# Altium PCB Peak Detector With Banking.PcbDoc (part 4 of 5)
Units mil, origin at the board's own origin, x right, y up, seen from the top; angles counter-clockwise.
Board outline 3330 x 2725 mil, 4 copper layers (TopLayer, GROUND, MidLayer1, BottomLayer); 549 components, 391 nets, 1594 pads, 460 vias.
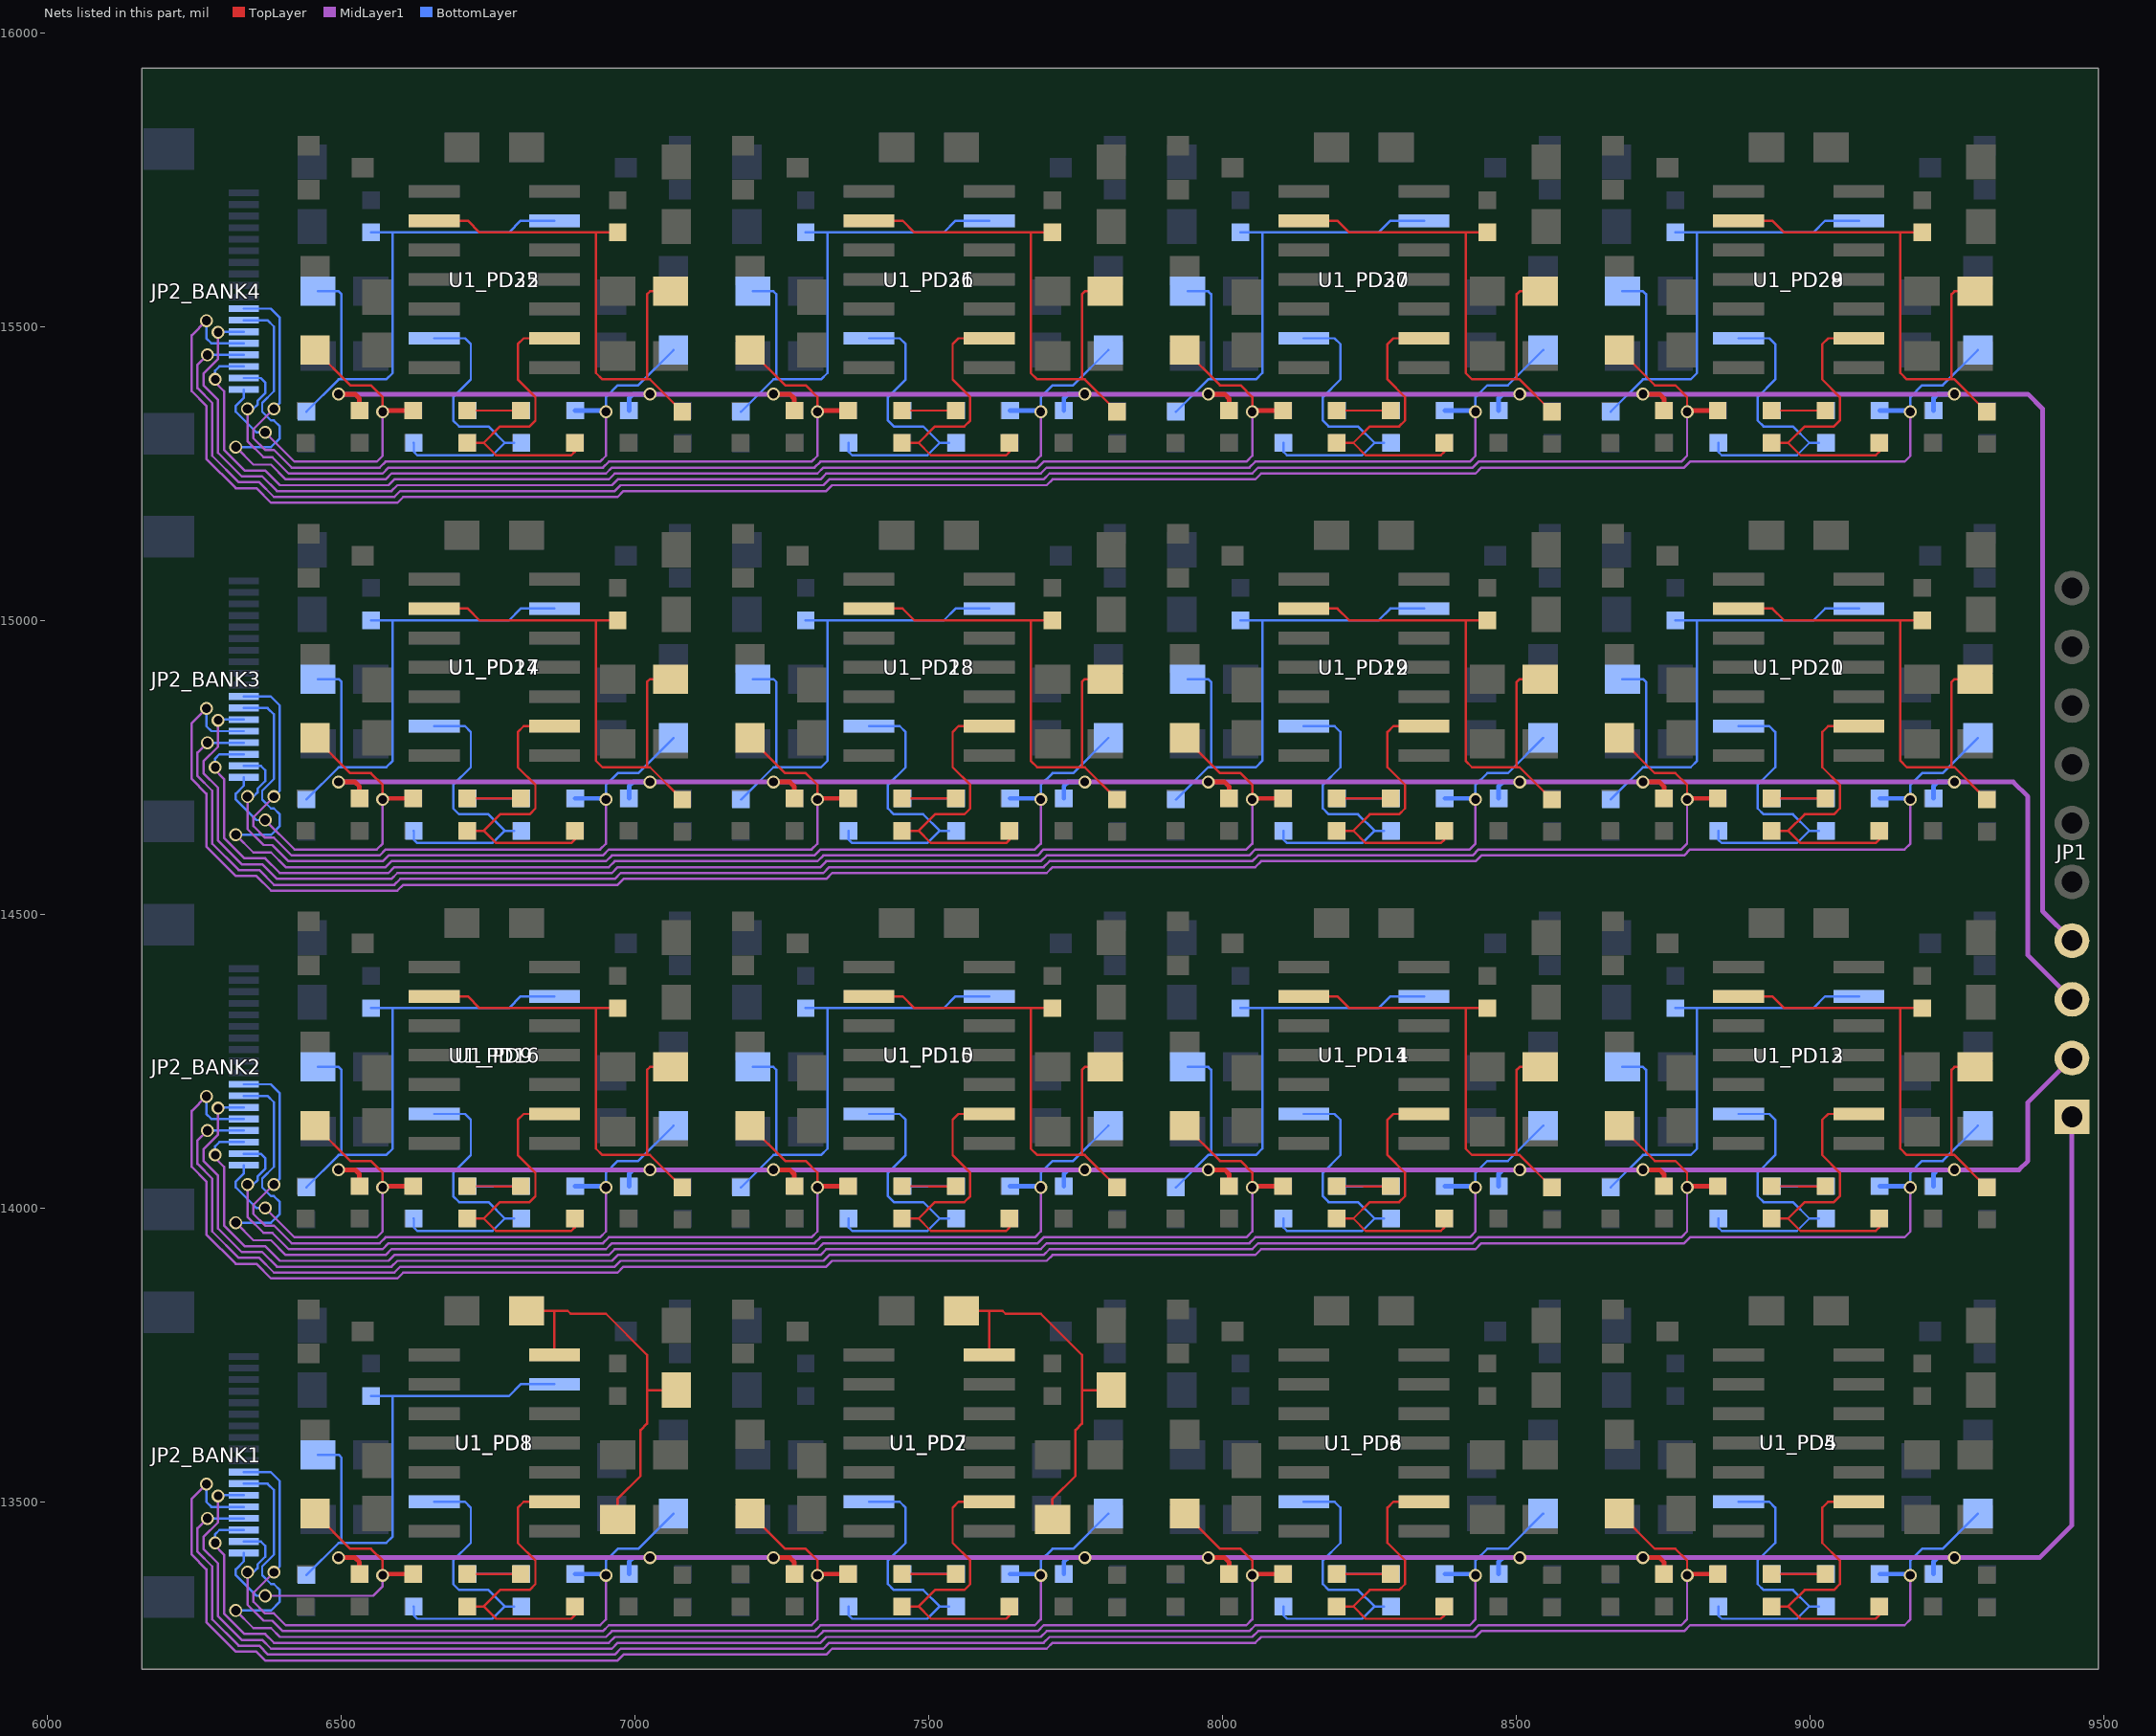
[diagram p6: the nets of this part, all layers, seen from the top]

## Via types
v1: diameter 22, hole 15, TopLayer to BottomLayer, 432 vias
v2: diameter 22, hole 16, TopLayer to BottomLayer, 28 vias

## Nets (pads, with @x,y where several pads share a name; then routed paths per layer and width w, separated by ;. In a path a pad name is that pad's centre, name@x,y a point inside that pad or via, vN(x,y) a via of type N, cw(c..) or ccw(c..) an arc to the next point about the centre after c; other vN are vias at no path point) (continued)
NetC5_PD8_2: C5_PD8.2 R8_PD8.2 R88_PD8.1 U1_PD8.9 | length 921.1
  BottomLayer w4: R8_PD8.2@6440,13375 6495,13430 6500,13430 ; C5_PD8.2@6459.99,13580 6495,13580 6500,13575 6500,13430 ; R88_PD8.1@6550,13680 6587,13680 ; U1_PD8.9@6862.37,13700 6805,13700 6785,13680 6587,13680 ; 6500,13430 6576,13430 6587,13441 6587,13680
NetC5_PD9_2: C5_PD9.2 R8_PD9.2 R88_PD9.1 U1_PD9.9 | length 921.1
  TopLayer w4: U1_PD9.9@6657.63,14360 6715,14360 6735,14340 6933,14340 ; R88_PD9.1@6970,14340 6933,14340 ; C5_PD9.2@7060.01,14240 7025,14240 7020,14235 7020,14090 ; R8_PD9.2@7080,14035 7025,14090 7020,14090 ; 6933,14340 6933,14101 6944,14090 7020,14090
NetC5_PD10_2: C5_PD10.2 R8_PD10.2 R88_PD10.1 U1_PD10.9 | length 921.1
  TopLayer w4: U1_PD10.9@7397.63,14360 7455,14360 7475,14340 7673,14340 ; R88_PD10.1@7710,14340 7673,14340 ; C5_PD10.2@7800.01,14240 7765,14240 7760,14235 7760,14090 ; R8_PD10.2@7820,14035 7765,14090 7760,14090 ; 7673,14340 7673,14101 7684,14090 7760,14090
NetC5_PD11_2: C5_PD11.2 R8_PD11.2 R88_PD11.1 U1_PD11.9 | length 921.1
  TopLayer w4: U1_PD11.9@8137.63,14360 8195,14360 8215,14340 8413,14340 ; R88_PD11.1@8450,14340 8413,14340 ; C5_PD11.2@8540.01,14240 8505,14240 8500,14235 8500,14090 ; R8_PD11.2@8560,14035 8505,14090 8500,14090 ; 8413,14340 8413,14101 8424,14090 8500,14090
NetC5_PD12_2: C5_PD12.2 R8_PD12.2 R88_PD12.1 U1_PD12.9 | length 921.1
  TopLayer w4: U1_PD12.9@8877.63,14360 8935,14360 8955,14340 9153,14340 ; R88_PD12.1@9190,14340 9153,14340 ; C5_PD12.2@9280.01,14240 9245,14240 9240,14235 9240,14090 ; R8_PD12.2@9300,14035 9245,14090 9240,14090 ; 9153,14340 9153,14101 9164,14090 9240,14090
NetC5_PD13_2: C5_PD13.2 R8_PD13.2 R88_PD13.1 U1_PD13.9 | length 921.1
  BottomLayer w4: R8_PD13.2@8660,14035 8715,14090 8720,14090 ; C5_PD13.2@8679.99,14240 8715,14240 8720,14235 8720,14090 ; R88_PD13.1@8770,14340 8807,14340 ; U1_PD13.9@9082.37,14360 9025,14360 9005,14340 8807,14340 ; 8720,14090 8796,14090 8807,14101 8807,14340
NetC5_PD14_2: C5_PD14.2 R8_PD14.2 R88_PD14.1 U1_PD14.9 | length 921.1
  BottomLayer w4: R8_PD14.2@7920,14035 7975,14090 7980,14090 ; C5_PD14.2@7939.99,14240 7975,14240 7980,14235 7980,14090 ; R88_PD14.1@8030,14340 8067,14340 ; U1_PD14.9@8342.37,14360 8285,14360 8265,14340 8067,14340 ; 7980,14090 8056,14090 8067,14101 8067,14340
NetC5_PD15_2: C5_PD15.2 R8_PD15.2 R88_PD15.1 U1_PD15.9 | length 921.1
  BottomLayer w4: R8_PD15.2@7180,14035 7235,14090 7240,14090 ; C5_PD15.2@7199.99,14240 7235,14240 7240,14235 7240,14090 ; R88_PD15.1@7290,14340 7327,14340 ; U1_PD15.9@7602.37,14360 7545,14360 7525,14340 7327,14340 ; 7240,14090 7316,14090 7327,14101 7327,14340
NetC5_PD16_2: C5_PD16.2 R8_PD16.2 R88_PD16.1 U1_PD16.9 | length 921.1
  BottomLayer w4: R8_PD16.2@6440,14035 6495,14090 6500,14090 ; C5_PD16.2@6459.99,14240 6495,14240 6500,14235 6500,14090 ; R88_PD16.1@6550,14340 6587,14340 ; U1_PD16.9@6862.37,14360 6805,14360 6785,14340 6587,14340 ; 6500,14090 6576,14090 6587,14101 6587,14340
NetC5_PD17_2: C5_PD17.2 R8_PD17.2 R88_PD17.1 U1_PD17.9 | length 921.1
  TopLayer w4: U1_PD17.9@6657.63,15020 6715,15020 6735,15000 6933,15000 ; R88_PD17.1@6970,15000 6933,15000 ; C5_PD17.2@7060.01,14900 7025,14900 7020,14895 7020,14750 ; R8_PD17.2@7080,14695 7025,14750 7020,14750 ; 6933,15000 6933,14761 6944,14750 7020,14750
NetC5_PD18_2: C5_PD18.2 R8_PD18.2 R88_PD18.1 U1_PD18.9 | length 921.1
  TopLayer w4: U1_PD18.9@7397.63,15020 7455,15020 7475,15000 7673,15000 ; R88_PD18.1@7710,15000 7673,15000 ; C5_PD18.2@7800.01,14900 7765,14900 7760,14895 7760,14750 ; R8_PD18.2@7820,14695 7765,14750 7760,14750 ; 7673,15000 7673,14761 7684,14750 7760,14750
NetC5_PD19_2: C5_PD19.2 R8_PD19.2 R88_PD19.1 U1_PD19.9 | length 921.1
  TopLayer w4: U1_PD19.9@8137.63,15020 8195,15020 8215,15000 8413,15000 ; R88_PD19.1@8450,15000 8413,15000 ; C5_PD19.2@8540.01,14900 8505,14900 8500,14895 8500,14750 ; R8_PD19.2@8560,14695 8505,14750 8500,14750 ; 8413,15000 8413,14761 8424,14750 8500,14750
NetC5_PD20_2: C5_PD20.2 R8_PD20.2 R88_PD20.1 U1_PD20.9 | length 921.1
  TopLayer w4: U1_PD20.9@8877.63,15020 8935,15020 8955,15000 9153,15000 ; R88_PD20.1@9190,15000 9153,15000 ; C5_PD20.2@9280.01,14900 9245,14900 9240,14895 9240,14750 ; R8_PD20.2@9300,14695 9245,14750 9240,14750 ; 9153,15000 9153,14761 9164,14750 9240,14750
NetC5_PD21_2: C5_PD21.2 R8_PD21.2 R88_PD21.1 U1_PD21.9 | length 921.1
  BottomLayer w4: R8_PD21.2@8660,14695 8715,14750 8720,14750 ; C5_PD21.2@8679.99,14900 8715,14900 8720,14895 8720,14750 ; R88_PD21.1@8770,15000 8807,15000 ; U1_PD21.9@9082.37,15020 9025,15020 9005,15000 8807,15000 ; 8720,14750 8796,14750 8807,14761 8807,15000
NetC5_PD22_2: C5_PD22.2 R8_PD22.2 R88_PD22.1 U1_PD22.9 | length 921.1
  BottomLayer w4: R8_PD22.2@7920,14695 7975,14750 7980,14750 ; C5_PD22.2@7939.99,14900 7975,14900 7980,14895 7980,14750 ; R88_PD22.1@8030,15000 8067,15000 ; U1_PD22.9@8342.37,15020 8285,15020 8265,15000 8067,15000 ; 7980,14750 8056,14750 8067,14761 8067,15000
NetC5_PD23_2: C5_PD23.2 R8_PD23.2 R88_PD23.1 U1_PD23.9 | length 921.1
  BottomLayer w4: R8_PD23.2@7180,14695 7235,14750 7240,14750 ; C5_PD23.2@7199.99,14900 7235,14900 7240,14895 7240,14750 ; R88_PD23.1@7290,15000 7327,15000 ; U1_PD23.9@7602.37,15020 7545,15020 7525,15000 7327,15000 ; 7240,14750 7316,14750 7327,14761 7327,15000
NetC5_PD24_2: C5_PD24.2 R8_PD24.2 R88_PD24.1 U1_PD24.9 | length 921.1
  BottomLayer w4: R8_PD24.2@6440,14695 6495,14750 6500,14750 ; C5_PD24.2@6459.99,14900 6495,14900 6500,14895 6500,14750 ; R88_PD24.1@6550,15000 6587,15000 ; U1_PD24.9@6862.37,15020 6805,15020 6785,15000 6587,15000 ; 6500,14750 6576,14750 6587,14761 6587,15000
NetC5_PD25_2: C5_PD25.2 R8_PD25.2 R88_PD25.1 U1_PD25.9 | length 921.1
  TopLayer w4: U1_PD25.9@6657.63,15680 6715,15680 6735,15660 6933,15660 ; R88_PD25.1@6970,15660 6933,15660 ; C5_PD25.2@7060.01,15560 7025,15560 7020,15555 7020,15410 ; R8_PD25.2@7080,15355 7025,15410 7020,15410 ; 6933,15660 6933,15421 6944,15410 7020,15410
NetC5_PD26_2: C5_PD26.2 R8_PD26.2 R88_PD26.1 U1_PD26.9 | length 921.1
  TopLayer w4: U1_PD26.9@7397.63,15680 7455,15680 7475,15660 7673,15660 ; R88_PD26.1@7710,15660 7673,15660 ; C5_PD26.2@7800.01,15560 7765,15560 7760,15555 7760,15410 ; R8_PD26.2@7820,15355 7765,15410 7760,15410 ; 7673,15660 7673,15421 7684,15410 7760,15410
NetC5_PD27_2: C5_PD27.2 R8_PD27.2 R88_PD27.1 U1_PD27.9 | length 921.1
  TopLayer w4: U1_PD27.9@8137.63,15680 8195,15680 8215,15660 8413,15660 ; R88_PD27.1@8450,15660 8413,15660 ; C5_PD27.2@8540.01,15560 8505,15560 8500,15555 8500,15410 ; R8_PD27.2@8560,15355 8505,15410 8500,15410 ; 8413,15660 8413,15421 8424,15410 8500,15410
NetC5_PD28_2: C5_PD28.2 R8_PD28.2 R88_PD28.1 U1_PD28.9 | length 921.1
  TopLayer w4: U1_PD28.9@8877.63,15680 8935,15680 8955,15660 9153,15660 ; R88_PD28.1@9190,15660 9153,15660 ; C5_PD28.2@9280.01,15560 9245,15560 9240,15555 9240,15410 ; R8_PD28.2@9300,15355 9245,15410 9240,15410 ; 9153,15660 9153,15421 9164,15410 9240,15410
NetC5_PD29_2: C5_PD29.2 R8_PD29.2 R88_PD29.1 U1_PD29.9 | length 921.1
  BottomLayer w4: R8_PD29.2@8660,15355 8715,15410 8720,15410 ; C5_PD29.2@8679.99,15560 8715,15560 8720,15555 8720,15410 ; R88_PD29.1@8770,15660 8807,15660 ; U1_PD29.9@9082.37,15680 9025,15680 9005,15660 8807,15660 ; 8720,15410 8796,15410 8807,15421 8807,15660
NetC5_PD30_2: C5_PD30.2 R8_PD30.2 R88_PD30.1 U1_PD30.9 | length 921.1
  BottomLayer w4: R8_PD30.2@7920,15355 7975,15410 7980,15410 ; C5_PD30.2@7939.99,15560 7975,15560 7980,15555 7980,15410 ; R88_PD30.1@8030,15660 8067,15660 ; U1_PD30.9@8342.37,15680 8285,15680 8265,15660 8067,15660 ; 7980,15410 8056,15410 8067,15421 8067,15660
NetC5_PD31_2: C5_PD31.2 R8_PD31.2 R88_PD31.1 U1_PD31.9 | length 921.1
  BottomLayer w4: R8_PD31.2@7180,15355 7235,15410 7240,15410 ; C5_PD31.2@7199.99,15560 7235,15560 7240,15555 7240,15410 ; R88_PD31.1@7290,15660 7327,15660 ; U1_PD31.9@7602.37,15680 7545,15680 7525,15660 7327,15660 ; 7240,15410 7316,15410 7327,15421 7327,15660
NetC5_PD32_2: C5_PD32.2 R8_PD32.2 R88_PD32.1 U1_PD32.9 | length 921.1
  BottomLayer w4: R8_PD32.2@6440,15355 6495,15410 6500,15410 ; C5_PD32.2@6459.99,15560 6495,15560 6500,15555 6500,15410 ; R88_PD32.1@6550,15660 6587,15660 ; U1_PD32.9@6862.37,15680 6805,15680 6785,15660 6587,15660 ; 6500,15410 6576,15410 6587,15421 6587,15660
NetR1_PD1_2: R1_PD1.2 R2_PD1.2 U1_PD1.2 | length 510
  TopLayer w4: R2_PD1.2@6726,13322 6742,13322 ; U1_PD1.2@6862.35,13500 6810,13500 6800,13490 6800,13430 6830,13400 6830,13360 6820,13350 6770,13350 6742,13322 ; R1_PD1.2@6897,13321.99 R1_PD1.2@6896.86,13321.99 6896.86,13306.86 6890.93,13300.93 6763.07,13300.93 6742,13322
NetR1_PD2_2: R1_PD2.2 R2_PD2.2 U1_PD2.2 | length 510
  TopLayer w4: R2_PD2.2@7466,13322 7482,13322 ; U1_PD2.2@7602.35,13500 7550,13500 7540,13490 7540,13430 7570,13400 7570,13360 7560,13350 7510,13350 7482,13322 ; R1_PD2.2@7637,13321.99 R1_PD2.2@7636.86,13321.99 7636.86,13306.86 7630.93,13300.93 7503.07,13300.93 7482,13322
NetR1_PD3_2: R1_PD3.2 R2_PD3.2 U1_PD3.2 | length 510
  TopLayer w4: R2_PD3.2@8206,13322 8222,13322 ; U1_PD3.2@8342.35,13500 8290,13500 8280,13490 8280,13430 8310,13400 8310,13360 8300,13350 8250,13350 8222,13322 ; R1_PD3.2@8377,13321.99 R1_PD3.2@8376.86,13321.99 8376.86,13306.86 8370.93,13300.93 8243.07,13300.93 8222,13322
NetR1_PD4_2: R1_PD4.2 R2_PD4.2 U1_PD4.2 | length 510
  TopLayer w4: R2_PD4.2@8946,13322 8962,13322 ; U1_PD4.2@9082.35,13500 9030,13500 9020,13490 9020,13430 9050,13400 9050,13360 9040,13350 8990,13350 8962,13322 ; R1_PD4.2@9117,13321.99 R1_PD4.2@9116.86,13321.99 9116.86,13306.86 9110.93,13300.93 8983.07,13300.93 8962,13322
NetR1_PD5_2: R1_PD5.2 R2_PD5.2 U1_PD5.2 | length 510
  BottomLayer w4: R1_PD5.2@8843,13321.99 R1_PD5.2@8843.14,13321.99 8843.14,13306.86 8849.07,13300.93 8976.93,13300.93 8998,13322 ; U1_PD5.2@8877.65,13500 8930,13500 8940,13490 8940,13430 8910,13400 8910,13360 8920,13350 8970,13350 8998,13322 ; R2_PD5.2@9014,13322 8998,13322
NetR1_PD6_2: R1_PD6.2 R2_PD6.2 U1_PD6.2 | length 510
  BottomLayer w4: R1_PD6.2@8103,13321.99 R1_PD6.2@8103.14,13321.99 8103.14,13306.86 8109.07,13300.93 8236.93,13300.93 8258,13322 ; U1_PD6.2@8137.65,13500 8190,13500 8200,13490 8200,13430 8170,13400 8170,13360 8180,13350 8230,13350 8258,13322 ; R2_PD6.2@8274,13322 8258,13322
NetR1_PD7_2: R1_PD7.2 R2_PD7.2 U1_PD7.2 | length 510
  BottomLayer w4: R1_PD7.2@7363,13321.99 R1_PD7.2@7363.14,13321.99 7363.14,13306.86 7369.07,13300.93 7496.93,13300.93 7518,13322 ; U1_PD7.2@7397.65,13500 7450,13500 7460,13490 7460,13430 7430,13400 7430,13360 7440,13350 7490,13350 7518,13322 ; R2_PD7.2@7534,13322 7518,13322
NetR1_PD8_2: R1_PD8.2 R2_PD8.2 U1_PD8.2 | length 510
  BottomLayer w4: R1_PD8.2@6623,13321.99 R1_PD8.2@6623.14,13321.99 6623.14,13306.86 6629.07,13300.93 6756.93,13300.93 6778,13322 ; U1_PD8.2@6657.65,13500 6710,13500 6720,13490 6720,13430 6690,13400 6690,13360 6700,13350 6750,13350 6778,13322 ; R2_PD8.2@6794,13322 6778,13322
NetR1_PD9_2: R1_PD9.2 R2_PD9.2 U1_PD9.2 | length 510
  TopLayer w4: R2_PD9.2@6726,13982 6742,13982 ; U1_PD9.2@6862.35,14160 6810,14160 6800,14150 6800,14090 6830,14060 6830,14020 6820,14010 6770,14010 6742,13982 ; R1_PD9.2@6897,13981.99 R1_PD9.2@6896.86,13981.99 6896.86,13966.86 6890.93,13960.93 6763.07,13960.93 6742,13982
NetR1_PD10_2: R1_PD10.2 R2_PD10.2 U1_PD10.2 | length 510
  TopLayer w4: R2_PD10.2@7466,13982 7482,13982 ; U1_PD10.2@7602.35,14160 7550,14160 7540,14150 7540,14090 7570,14060 7570,14020 7560,14010 7510,14010 7482,13982 ; R1_PD10.2@7637,13981.99 R1_PD10.2@7636.86,13981.99 7636.86,13966.86 7630.93,13960.93 7503.07,13960.93 7482,13982
NetR1_PD11_2: R1_PD11.2 R2_PD11.2 U1_PD11.2 | length 510
  TopLayer w4: R2_PD11.2@8206,13982 8222,13982 ; U1_PD11.2@8342.35,14160 8290,14160 8280,14150 8280,14090 8310,14060 8310,14020 8300,14010 8250,14010 8222,13982 ; R1_PD11.2@8377,13981.99 R1_PD11.2@8376.86,13981.99 8376.86,13966.86 8370.93,13960.93 8243.07,13960.93 8222,13982
NetR1_PD12_2: R1_PD12.2 R2_PD12.2 U1_PD12.2 | length 510
  TopLayer w4: R2_PD12.2@8946,13982 8962,13982 ; U1_PD12.2@9082.35,14160 9030,14160 9020,14150 9020,14090 9050,14060 9050,14020 9040,14010 8990,14010 8962,13982 ; R1_PD12.2@9117,13981.99 R1_PD12.2@9116.86,13981.99 9116.86,13966.86 9110.93,13960.93 8983.07,13960.93 8962,13982
NetR1_PD13_2: R1_PD13.2 R2_PD13.2 U1_PD13.2 | length 510
  BottomLayer w4: R1_PD13.2@8843,13981.99 R1_PD13.2@8843.14,13981.99 8843.14,13966.86 8849.07,13960.93 8976.93,13960.93 8998,13982 ; U1_PD13.2@8877.65,14160 8930,14160 8940,14150 8940,14090 8910,14060 8910,14020 8920,14010 8970,14010 8998,13982 ; R2_PD13.2@9014,13982 8998,13982
NetR1_PD14_2: R1_PD14.2 R2_PD14.2 U1_PD14.2 | length 510
  BottomLayer w4: R1_PD14.2@8103,13981.99 R1_PD14.2@8103.14,13981.99 8103.14,13966.86 8109.07,13960.93 8236.93,13960.93 8258,13982 ; U1_PD14.2@8137.65,14160 8190,14160 8200,14150 8200,14090 8170,14060 8170,14020 8180,14010 8230,14010 8258,13982 ; R2_PD14.2@8274,13982 8258,13982
NetR1_PD15_2: R1_PD15.2 R2_PD15.2 U1_PD15.2 | length 510
  BottomLayer w4: R1_PD15.2@7363,13981.99 R1_PD15.2@7363.14,13981.99 7363.14,13966.86 7369.07,13960.93 7496.93,13960.93 7518,13982 ; U1_PD15.2@7397.65,14160 7450,14160 7460,14150 7460,14090 7430,14060 7430,14020 7440,14010 7490,14010 7518,13982 ; R2_PD15.2@7534,13982 7518,13982
NetR1_PD16_2: R1_PD16.2 R2_PD16.2 U1_PD16.2 | length 510
  BottomLayer w4: R1_PD16.2@6623,13981.99 R1_PD16.2@6623.14,13981.99 6623.14,13966.86 6629.07,13960.93 6756.93,13960.93 6778,13982 ; U1_PD16.2@6657.65,14160 6710,14160 6720,14150 6720,14090 6690,14060 6690,14020 6700,14010 6750,14010 6778,13982 ; R2_PD16.2@6794,13982 6778,13982
NetR1_PD17_2: R1_PD17.2 R2_PD17.2 U1_PD17.2 | length 510
  TopLayer w4: R2_PD17.2@6726,14642 6742,14642 ; U1_PD17.2@6862.35,14820 6810,14820 6800,14810 6800,14750 6830,14720 6830,14680 6820,14670 6770,14670 6742,14642 ; R1_PD17.2@6897,14641.99 R1_PD17.2@6896.86,14641.99 6896.86,14626.86 6890.93,14620.93 6763.07,14620.93 6742,14642
NetR1_PD18_2: R1_PD18.2 R2_PD18.2 U1_PD18.2 | length 510
  TopLayer w4: R2_PD18.2@7466,14642 7482,14642 ; U1_PD18.2@7602.35,14820 7550,14820 7540,14810 7540,14750 7570,14720 7570,14680 7560,14670 7510,14670 7482,14642 ; R1_PD18.2@7637,14641.99 R1_PD18.2@7636.86,14641.99 7636.86,14626.86 7630.93,14620.93 7503.07,14620.93 7482,14642
NetR1_PD19_2: R1_PD19.2 R2_PD19.2 U1_PD19.2 | length 510
  TopLayer w4: R2_PD19.2@8206,14642 8222,14642 ; U1_PD19.2@8342.35,14820 8290,14820 8280,14810 8280,14750 8310,14720 8310,14680 8300,14670 8250,14670 8222,14642 ; R1_PD19.2@8377,14641.99 R1_PD19.2@8376.86,14641.99 8376.86,14626.86 8370.93,14620.93 8243.07,14620.93 8222,14642
NetR1_PD20_2: R1_PD20.2 R2_PD20.2 U1_PD20.2 | length 510
  TopLayer w4: R2_PD20.2@8946,14642 8962,14642 ; U1_PD20.2@9082.35,14820 9030,14820 9020,14810 9020,14750 9050,14720 9050,14680 9040,14670 8990,14670 8962,14642 ; R1_PD20.2@9117,14641.99 R1_PD20.2@9116.86,14641.99 9116.86,14626.86 9110.93,14620.93 8983.07,14620.93 8962,14642
NetR1_PD21_2: R1_PD21.2 R2_PD21.2 U1_PD21.2 | length 510
  BottomLayer w4: R1_PD21.2@8843,14641.99 R1_PD21.2@8843.14,14641.99 8843.14,14626.86 8849.07,14620.93 8976.93,14620.93 8998,14642 ; U1_PD21.2@8877.65,14820 8930,14820 8940,14810 8940,14750 8910,14720 8910,14680 8920,14670 8970,14670 8998,14642 ; R2_PD21.2@9014,14642 8998,14642
NetR1_PD22_2: R1_PD22.2 R2_PD22.2 U1_PD22.2 | length 510
  BottomLayer w4: R1_PD22.2@8103,14641.99 R1_PD22.2@8103.14,14641.99 8103.14,14626.86 8109.07,14620.93 8236.93,14620.93 8258,14642 ; U1_PD22.2@8137.65,14820 8190,14820 8200,14810 8200,14750 8170,14720 8170,14680 8180,14670 8230,14670 8258,14642 ; R2_PD22.2@8274,14642 8258,14642
NetR1_PD23_2: R1_PD23.2 R2_PD23.2 U1_PD23.2 | length 510
  BottomLayer w4: R1_PD23.2@7363,14641.99 R1_PD23.2@7363.14,14641.99 7363.14,14626.86 7369.07,14620.93 7496.93,14620.93 7518,14642 ; U1_PD23.2@7397.65,14820 7450,14820 7460,14810 7460,14750 7430,14720 7430,14680 7440,14670 7490,14670 7518,14642 ; R2_PD23.2@7534,14642 7518,14642
NetR1_PD24_2: R1_PD24.2 R2_PD24.2 U1_PD24.2 | length 510
  BottomLayer w4: R1_PD24.2@6623,14641.99 R1_PD24.2@6623.14,14641.99 6623.14,14626.86 6629.07,14620.93 6756.93,14620.93 6778,14642 ; U1_PD24.2@6657.65,14820 6710,14820 6720,14810 6720,14750 6690,14720 6690,14680 6700,14670 6750,14670 6778,14642 ; R2_PD24.2@6794,14642 6778,14642
NetR1_PD25_2: R1_PD25.2 R2_PD25.2 U1_PD25.2 | length 510
  TopLayer w4: R2_PD25.2@6726,15302 6742,15302 ; U1_PD25.2@6862.35,15480 6810,15480 6800,15470 6800,15410 6830,15380 6830,15340 6820,15330 6770,15330 6742,15302 ; R1_PD25.2@6897,15301.99 R1_PD25.2@6896.86,15301.99 6896.86,15286.86 6890.93,15280.93 6763.07,15280.93 6742,15302
NetR1_PD26_2: R1_PD26.2 R2_PD26.2 U1_PD26.2 | length 510
  TopLayer w4: R2_PD26.2@7466,15302 7482,15302 ; U1_PD26.2@7602.35,15480 7550,15480 7540,15470 7540,15410 7570,15380 7570,15340 7560,15330 7510,15330 7482,15302 ; R1_PD26.2@7637,15301.99 R1_PD26.2@7636.86,15301.99 7636.86,15286.86 7630.93,15280.93 7503.07,15280.93 7482,15302
NetR1_PD27_2: R1_PD27.2 R2_PD27.2 U1_PD27.2 | length 510
  TopLayer w4: R2_PD27.2@8206,15302 8222,15302 ; U1_PD27.2@8342.35,15480 8290,15480 8280,15470 8280,15410 8310,15380 8310,15340 8300,15330 8250,15330 8222,15302 ; R1_PD27.2@8377,15301.99 R1_PD27.2@8376.86,15301.99 8376.86,15286.86 8370.93,15280.93 8243.07,15280.93 8222,15302
NetR1_PD28_2: R1_PD28.2 R2_PD28.2 U1_PD28.2 | length 510
  TopLayer w4: R2_PD28.2@8946,15302 8962,15302 ; U1_PD28.2@9082.35,15480 9030,15480 9020,15470 9020,15410 9050,15380 9050,15340 9040,15330 8990,15330 8962,15302 ; R1_PD28.2@9117,15301.99 R1_PD28.2@9116.86,15301.99 9116.86,15286.86 9110.93,15280.93 8983.07,15280.93 8962,15302
NetR1_PD29_2: R1_PD29.2 R2_PD29.2 U1_PD29.2 | length 510
  BottomLayer w4: R1_PD29.2@8843,15301.99 R1_PD29.2@8843.14,15301.99 8843.14,15286.86 8849.07,15280.93 8976.93,15280.93 8998,15302 ; U1_PD29.2@8877.65,15480 8930,15480 8940,15470 8940,15410 8910,15380 8910,15340 8920,15330 8970,15330 8998,15302 ; R2_PD29.2@9014,15302 8998,15302
NetR1_PD30_2: R1_PD30.2 R2_PD30.2 U1_PD30.2 | length 510
  BottomLayer w4: R1_PD30.2@8103,15301.99 R1_PD30.2@8103.14,15301.99 8103.14,15286.86 8109.07,15280.93 8236.93,15280.93 8258,15302 ; U1_PD30.2@8137.65,15480 8190,15480 8200,15470 8200,15410 8170,15380 8170,15340 8180,15330 8230,15330 8258,15302 ; R2_PD30.2@8274,15302 8258,15302
NetR1_PD31_2: R1_PD31.2 R2_PD31.2 U1_PD31.2 | length 510
  BottomLayer w4: R1_PD31.2@7363,15301.99 R1_PD31.2@7363.14,15301.99 7363.14,15286.86 7369.07,15280.93 7496.93,15280.93 7518,15302 ; U1_PD31.2@7397.65,15480 7450,15480 7460,15470 7460,15410 7430,15380 7430,15340 7440,15330 7490,15330 7518,15302 ; R2_PD31.2@7534,15302 7518,15302
NetR1_PD32_2: R1_PD32.2 R2_PD32.2 U1_PD32.2 | length 510
  BottomLayer w4: R1_PD32.2@6623,15301.99 R1_PD32.2@6623.14,15301.99 6623.14,15286.86 6629.07,15280.93 6756.93,15280.93 6778,15302 ; U1_PD32.2@6657.65,15480 6710,15480 6720,15470 6720,15410 6690,15380 6690,15340 6700,15330 6750,15330 6778,15302 ; R2_PD32.2@6794,15302 6778,15302
NetR2_PD1_1: R2_PD1.1 RPOT_PD1.1 | length 91.6
  TopLayer w4: R2_PD1.1@6713.71,13376.99 6760,13377 RPOT_PD1.1@6805.29,13376.99
NetR2_PD2_1: R2_PD2.1 RPOT_PD2.1 | length 91.6
  TopLayer w4: R2_PD2.1@7453.71,13376.99 7500,13377 RPOT_PD2.1@7545.29,13376.99
NetR2_PD3_1: R2_PD3.1 RPOT_PD3.1 | length 91.6
  TopLayer w4: R2_PD3.1@8193.71,13376.99 8240,13377 RPOT_PD3.1@8285.29,13376.99
NetR2_PD4_1: R2_PD4.1 RPOT_PD4.1 | length 91.6
  TopLayer w4: R2_PD4.1@8933.71,13376.99 8980,13377 RPOT_PD4.1@9025.29,13376.99
NetR2_PD5_1: R2_PD5.1 RPOT_PD5.1 | length 91.6
  BottomLayer w4: RPOT_PD5.1@8934.71,13376.99 8980,13376.99 R2_PD5.1@9026.29,13376.99
NetR2_PD6_1: R2_PD6.1 RPOT_PD6.1 | length 91.6
  BottomLayer w4: RPOT_PD6.1@8194.71,13376.99 8240,13376.99 R2_PD6.1@8286.29,13376.99
NetR2_PD7_1: R2_PD7.1 RPOT_PD7.1 | length 91.6
  BottomLayer w4: RPOT_PD7.1@7454.71,13376.99 7500,13376.99 R2_PD7.1@7546.29,13376.99
NetR2_PD8_1: R2_PD8.1 RPOT_PD8.1 | length 91.6
  BottomLayer w4: RPOT_PD8.1@6714.71,13376.99 6760,13376.99 R2_PD8.1@6806.29,13376.99
NetR2_PD9_1: R2_PD9.1 RPOT_PD9.1 | length 91.6
  TopLayer w4: R2_PD9.1@6713.71,14036.99 6760,14037 RPOT_PD9.1@6805.29,14036.99
NetR2_PD10_1: R2_PD10.1 RPOT_PD10.1 | length 91.6
  TopLayer w4: R2_PD10.1@7453.71,14036.99 7500,14037 RPOT_PD10.1@7545.29,14036.99
NetR2_PD11_1: R2_PD11.1 RPOT_PD11.1 | length 91.6
  TopLayer w4: R2_PD11.1@8193.71,14036.99 8240,14037 RPOT_PD11.1@8285.29,14036.99
NetR2_PD12_1: R2_PD12.1 RPOT_PD12.1 | length 91.6
  TopLayer w4: R2_PD12.1@8933.71,14036.99 8980,14037 RPOT_PD12.1@9025.29,14036.99
NetR2_PD13_1: R2_PD13.1 RPOT_PD13.1 | length 91.6
  BottomLayer w4: RPOT_PD13.1@8934.71,14036.99 8980,14036.99 R2_PD13.1@9026.29,14036.99
NetR2_PD14_1: R2_PD14.1 RPOT_PD14.1 | length 91.6
  BottomLayer w4: RPOT_PD14.1@8194.71,14036.99 8240,14036.99 R2_PD14.1@8286.29,14036.99
NetR2_PD15_1: R2_PD15.1 RPOT_PD15.1 | length 91.6
  BottomLayer w4: RPOT_PD15.1@7454.71,14036.99 7500,14036.99 R2_PD15.1@7546.29,14036.99
NetR2_PD16_1: R2_PD16.1 RPOT_PD16.1 | length 91.6
  BottomLayer w4: RPOT_PD16.1@6714.71,14036.99 6760,14036.99 R2_PD16.1@6806.29,14036.99
NetR2_PD17_1: R2_PD17.1 RPOT_PD17.1 | length 91.6
  TopLayer w4: R2_PD17.1@6713.71,14696.99 6760,14697 RPOT_PD17.1@6805.29,14696.99
NetR2_PD18_1: R2_PD18.1 RPOT_PD18.1 | length 91.6
  TopLayer w4: R2_PD18.1@7453.71,14696.99 7500,14697 RPOT_PD18.1@7545.29,14696.99
NetR2_PD19_1: R2_PD19.1 RPOT_PD19.1 | length 91.6
  TopLayer w4: R2_PD19.1@8193.71,14696.99 8240,14697 RPOT_PD19.1@8285.29,14696.99
NetR2_PD20_1: R2_PD20.1 RPOT_PD20.1 | length 91.6
  TopLayer w4: R2_PD20.1@8933.71,14696.99 8980,14697 RPOT_PD20.1@9025.29,14696.99
NetR2_PD21_1: R2_PD21.1 RPOT_PD21.1 | length 91.6
  BottomLayer w4: RPOT_PD21.1@8934.71,14696.99 8980,14696.99 R2_PD21.1@9026.29,14696.99
NetR2_PD22_1: R2_PD22.1 RPOT_PD22.1 | length 91.6
  BottomLayer w4: RPOT_PD22.1@8194.71,14696.99 8240,14696.99 R2_PD22.1@8286.29,14696.99
NetR2_PD23_1: R2_PD23.1 RPOT_PD23.1 | length 91.6
  BottomLayer w4: RPOT_PD23.1@7454.71,14696.99 7500,14696.99 R2_PD23.1@7546.29,14696.99
NetR2_PD24_1: R2_PD24.1 RPOT_PD24.1 | length 91.6
  BottomLayer w4: RPOT_PD24.1@6714.71,14696.99 6760,14696.99 R2_PD24.1@6806.29,14696.99
NetR2_PD25_1: R2_PD25.1 RPOT_PD25.1 | length 91.6
  TopLayer w4: R2_PD25.1@6713.71,15356.99 6760,15357 RPOT_PD25.1@6805.29,15356.99
NetR2_PD26_1: R2_PD26.1 RPOT_PD26.1 | length 91.6
  TopLayer w4: R2_PD26.1@7453.71,15356.99 7500,15357 RPOT_PD26.1@7545.29,15356.99
NetR2_PD27_1: R2_PD27.1 RPOT_PD27.1 | length 91.6
  TopLayer w4: R2_PD27.1@8193.71,15356.99 8240,15357 RPOT_PD27.1@8285.29,15356.99
NetR2_PD28_1: R2_PD28.1 RPOT_PD28.1 | length 91.6
  TopLayer w4: R2_PD28.1@8933.71,15356.99 8980,15357 RPOT_PD28.1@9025.29,15356.99
NetR2_PD29_1: R2_PD29.1 RPOT_PD29.1 | length 91.6
  BottomLayer w4: RPOT_PD29.1@8934.71,15356.99 8980,15356.99 R2_PD29.1@9026.29,15356.99
NetR2_PD30_1: R2_PD30.1 RPOT_PD30.1 | length 91.6
  BottomLayer w4: RPOT_PD30.1@8194.71,15356.99 8240,15356.99 R2_PD30.1@8286.29,15356.99
NetR2_PD31_1: R2_PD31.1 RPOT_PD31.1 | length 91.6
  BottomLayer w4: RPOT_PD31.1@7454.71,15356.99 7500,15356.99 R2_PD31.1@7546.29,15356.99
NetR2_PD32_1: R2_PD32.1 RPOT_PD32.1 | length 91.6
  BottomLayer w4: RPOT_PD32.1@6714.71,15356.99 6760,15356.99 R2_PD32.1@6806.29,15356.99
OFF1: JP1.1 R4_PD1.1 R4_PD2.1 R4_PD3.1 R4_PD4.1 R4_PD5.1 R4_PD6.1 R4_PD7.1 R4_PD8.1 | length 4142.3
  TopLayer w8: v1(6495,13405) 6523,13405 6530.57,13397.43 R4_PD1.1@6530.57,13376.99 ; v1(7235,13405) 7263,13405 7270.57,13397.43 R4_PD2.1@7270.57,13376.99 ; v1(7975,13405) 8003,13405 8010.57,13397.43 R4_PD3.1@8010.57,13376.99 ; v1(8715,13405) 8743,13405 8750.57,13397.43 R4_PD4.1@8750.57,13376.99
  MidLayer1 w8: v1(6495,13405) v1(7025,13405) v1(7235,13405) v1(7765,13405) v1(7975,13405) v1(8505,13405) v1(8715,13405) v1(9245,13405) 9390,13405 9445,13460 JP1.1@9445,14155
  BottomLayer w8: R4_PD8.1@6989.43,13376.99 6989.43,13398 6996.43,13405 v1(7025,13405) ; R4_PD7.1@7729.43,13376.99 7729.43,13398 7736.43,13405 v1(7765,13405) ; R4_PD6.1@8469.43,13376.99 8469.43,13398 8476.43,13405 v1(8505,13405) ; R4_PD5.1@9209.43,13376.99 9209.43,13398 9216.43,13405 v1(9245,13405)
OFF2: JP1.2 R4_PD9.1 R4_PD10.1 R4_PD11.1 R4_PD12.1 R4_PD13.1 R4_PD14.1 R4_PD15.1 R4_PD16.1 | length 3561.8
  TopLayer w8: v1(6495,14065) 6523,14065 6530.57,14057.43 R4_PD9.1@6530.57,14036.99 ; v1(7235,14065) 7263,14065 7270.57,14057.43 R4_PD10.1@7270.57,14036.99 ; v1(7975,14065) 8003,14065 8010.57,14057.43 R4_PD11.1@8010.57,14036.99 ; v1(8715,14065) 8743,14065 8750.57,14057.43 R4_PD12.1@8750.57,14036.99
  MidLayer1 w8: v1(6495,14065) v1(7025,14065) v1(7235,14065) v1(7765,14065) v1(7975,14065) v1(8505,14065) v1(8715,14065) v1(9245,14065) 9355,14065 9370,14080 9370,14180 JP1.2@9445,14255
  BottomLayer w8: R4_PD16.1@6989.43,14036.99 6989.43,14058 6996.43,14065 v1(7025,14065) ; R4_PD15.1@7729.43,14036.99 7729.43,14058 7736.43,14065 v1(7765,14065) ; R4_PD14.1@8469.43,14036.99 8469.43,14058 8476.43,14065 v1(8505,14065) ; R4_PD13.1@9209.43,14036.99 9209.43,14058 9216.43,14065 v1(9245,14065)
OFF3: JP1.3 R4_PD17.1 R4_PD18.1 R4_PD19.1 R4_PD20.1 R4_PD21.1 R4_PD22.1 R4_PD23.1 R4_PD24.1 | length 3735.9
  TopLayer w8: v1(6495,14725) 6523,14725 6530.57,14717.43 R4_PD17.1@6530.57,14696.99 ; v1(7235,14725) 7263,14725 7270.57,14717.43 R4_PD18.1@7270.57,14696.99 ; v1(7975,14725) 8003,14725 8010.57,14717.43 R4_PD19.1@8010.57,14696.99 ; v1(8715,14725) 8743,14725 8750.57,14717.43 R4_PD20.1@8750.57,14696.99
  MidLayer1 w8: v1(6495,14725) v1(7025,14725) v1(7235,14725) v1(7765,14725) v1(7975,14725) v1(8505,14725) v1(8715,14725) v1(9245,14725) 9345,14725 9370,14700 9370,14430 JP1.3@9445,14355
  BottomLayer w8: R4_PD24.1@6989.43,14696.99 6989.43,14718 6996.43,14725 v1(7025,14725) ; R4_PD23.1@7729.43,14696.99 7729.43,14718 7736.43,14725 v1(7765,14725) ; R4_PD22.1@8469.43,14696.99 8469.43,14718 8476.43,14725 v1(8505,14725) ; R4_PD21.1@9209.43,14696.99 9209.43,14718 9216.43,14725 v1(9245,14725)
OFF4: JP1.4 R4_PD25.1 R4_PD26.1 R4_PD27.1 R4_PD28.1 R4_PD29.1 R4_PD30.1 R4_PD31.1 R4_PD32.1 | length 4310.6
  TopLayer w8: v1(6495,15385) 6523,15385 6530.57,15377.43 R4_PD25.1@6530.57,15356.99 ; v1(7235,15385) 7263,15385 7270.57,15377.43 R4_PD26.1@7270.57,15356.99 ; v1(7975,15385) 8003,15385 8010.57,15377.43 R4_PD27.1@8010.57,15356.99 ; v1(8715,15385) 8743,15385 8750.57,15377.43 R4_PD28.1@8750.57,15356.99
  MidLayer1 w8: v1(6495,15385) v1(7025,15385) v1(7235,15385) v1(7765,15385) v1(7975,15385) v1(8505,15385) v1(8715,15385) v1(9245,15385) 9370,15385 9395,15360 9395,14505 JP1.4@9445,14455
  BottomLayer w8: R4_PD32.1@6989.43,15356.99 6989.43,15378 6996.43,15385 v1(7025,15385) ; R4_PD31.1@7729.43,15356.99 7729.43,15378 7736.43,15385 v1(7765,15385) ; R4_PD30.1@8469.43,15356.99 8469.43,15378 8476.43,15385 v1(8505,15385) ; R4_PD29.1@9209.43,15356.99 9209.43,15378 9216.43,15385 v1(9245,15385)
P1_BANK1: C1_PD1.2 JP2_BANK1.1 R3_PD1.2 | length 559.7
  TopLayer w4: C1_PD1.2@6455,13480 6515,13420 6550,13420 6570,13400 v1(6570,13375)
  TopLayer w8: v1(6570,13375) 6572,13377 R3_PD1.2@6622.14,13377
  MidLayer1 w4: v2(6370,13340) 6554,13340 6570,13356 v1(6570,13375)
  BottomLayer w4: JP2_BANK1.1@6333.98,13412.68 6333.98,13398.98 6320,13385 6320,13375 6355,13340 v2(6370,13340)
P1_BANK2: C1_PD9.2 JP2_BANK2.1 R3_PD9.2 | length 633.9
  TopLayer w4: C1_PD9.2@6455,14140 6515,14080 6550,14080 6570,14060 v1(6570,14035)
  TopLayer w8: v1(6570,14035) 6572,14037 R3_PD9.2@6622.14,14037
  MidLayer1 w4: v2(6370,14000) 6420,13950 6560,13950 6570,13960 v1(6570,14035)
  BottomLayer w4: JP2_BANK2.1@6333.98,14072.68 6333.98,14058.98 6320,14045 6320,14035 6355,14000 v2(6370,14000)
P1_BANK3: C1_PD17.2 JP2_BANK3.1 R3_PD17.2 | length 633.9
  TopLayer w4: C1_PD17.2@6455,14800 6515,14740 6550,14740 6570,14720 v1(6570,14695)
  TopLayer w8: v1(6570,14695) 6572,14697 R3_PD17.2@6622.14,14697
  MidLayer1 w4: v2(6370,14660) 6420,14610 6560,14610 6570,14620 v1(6570,14695)
  BottomLayer w4: JP2_BANK3.1@6333.98,14732.68 6333.98,14718.98 6320,14705 6320,14695 6355,14660 v2(6370,14660)
P1_BANK4: C1_PD25.2 JP2_BANK4.1 R3_PD25.2 | length 633.9
  TopLayer w4: C1_PD25.2@6455,15460 6515,15400 6550,15400 6570,15380 v1(6570,15355)
  TopLayer w8: v1(6570,15355) 6572,15357 R3_PD25.2@6622.14,15357
  MidLayer1 w4: v2(6370,15320) 6420,15270 6560,15270 6570,15280 v1(6570,15355)
  BottomLayer w4: JP2_BANK4.1@6333.98,15392.68 6333.98,15378.98 6320,15365 6320,15355 6355,15320 v2(6370,15320)
P2_BANK1: C1_PD2.2 JP2_BANK1.2 R3_PD2.2 | length 1455.4
  TopLayer w4: C1_PD2.2@7195,13480 7255,13420 7290,13420 7310,13400 v1(7310,13375)
  TopLayer w8: v1(7310,13375) 7312,13377 R3_PD2.2@7362.14,13377
  MidLayer1 w4: v2(6340,13380) 6340,13325 6367.38,13297.62 6382.38,13297.62 6400,13280 6945,13280 6955,13290 7300,13290 7310,13300 v1(7310,13375)
  BottomLayer w4: JP2_BANK1.2@6333.98,13432.36 6362.64,13432.36 6370,13425 6370,13406.31 6357,13393.31 6357,13387 6350,13380 v2(6340,13380)
P2_BANK2: C1_PD10.2 JP2_BANK2.2 R3_PD10.2 | length 1463.7
  TopLayer w4: C1_PD10.2@7195,14140 7255,14080 7290,14080 7310,14060 v1(7310,14035)
  TopLayer w8: v1(7310,14035) 7312,14037 R3_PD10.2@7362.14,14037
  MidLayer1 w4: v2(6340,14040) 6340,13985 6367.38,13957.62 6382.38,13957.62 6410,13930 6570,13930 6580,13940 6945,13940 6955,13950 7300,13950 7310,13960 v1(7310,14035)
  BottomLayer w4: JP2_BANK2.2@6333.98,14092.36 6362.64,14092.36 6370,14085 6370,14066.31 6357,14053.31 6357,14047 6350,14040 v2(6340,14040)
P2_BANK3: C1_PD18.2 JP2_BANK3.2 R3_PD18.2 | length 1463.7
  TopLayer w4: C1_PD18.2@7195,14800 7255,14740 7290,14740 7310,14720 v1(7310,14695)
  TopLayer w8: v1(7310,14695) 7312,14697 R3_PD18.2@7362.14,14697
  MidLayer1 w4: v2(6340,14700) 6340,14645 6367.38,14617.62 6382.38,14617.62 6410,14590 6570,14590 6580,14600 6945,14600 6955,14610 7300,14610 7310,14620 v1(7310,14695)
  BottomLayer w4: JP2_BANK3.2@6333.98,14752.36 6362.64,14752.36 6370,14745 6370,14726.31 6357,14713.31 6357,14707 6350,14700 v2(6340,14700)
P2_BANK4: C1_PD26.2 JP2_BANK4.2 R3_PD26.2 | length 1463.7
  TopLayer w4: C1_PD26.2@7195,15460 7255,15400 7290,15400 7310,15380 v1(7310,15355)
  TopLayer w8: v1(7310,15355) 7312,15357 R3_PD26.2@7362.14,15357
  MidLayer1 w4: v2(6340,15360) 6340,15305 6367.38,15277.62 6382.38,15277.62 6410,15250 6570,15250 6580,15260 6945,15260 6955,15270 7300,15270 7310,15280 v1(7310,15355)
  BottomLayer w4: JP2_BANK4.2@6333.98,15412.36 6362.64,15412.36 6370,15405 6370,15386.31 6357,15373.31 6357,15367 6350,15360 v2(6340,15360)
P3_BANK1: C1_PD3.2 JP2_BANK1.3 R3_PD3.2 | length 2287.1
  TopLayer w4: C1_PD3.2@7935,13480 7995,13420 8030,13420 8050,13400 v1(8050,13375)
  TopLayer w8: v1(8050,13375) 8052,13377 R3_PD3.2@8102.14,13377
  MidLayer1 w4: v1@6280,13430 6282.5,13427.5 6300,13410 6300,13310 6335,13275 6370,13275 6385,13260 6955,13260 6965,13270 7310,13270 7320,13280 7685,13280 7695,13290 8040,13290 8050,13300 v1(8050,13375)
  BottomLayer w4: v1@6280,13430 v1@6282.5,13432.5 ; v1(6285,13430) 6285,13445 6292.05,13452.05 JP2_BANK1.3@6333.98,13452.05
P3_BANK2: C1_PD11.2 JP2_BANK2.3 R3_PD11.2 | length 2295.4
  TopLayer w4: C1_PD11.2@7935,14140 7995,14080 8030,14080 8050,14060 v1(8050,14035)
  TopLayer w8: v1(8050,14035) 8052,14037 R3_PD11.2@8102.14,14037
  MidLayer1 w4: v1@6280,14090 6282.5,14087.5 6300,14070 6300,13970 6335,13935 6370,13935 6395,13910 6580,13910 6590,13920 6955,13920 6965,13930 7310,13930 7320,13940 7685,13940 7695,13950 8040,13950 8050,13960 v1(8050,14035)
  BottomLayer w4: v1@6280,14090 v1@6282.5,14092.5 ; v1(6285,14090) 6285,14105 6292.05,14112.05 JP2_BANK2.3@6333.98,14112.05
P3_BANK3: C1_PD19.2 JP2_BANK3.3 R3_PD19.2 | length 2295.4
  TopLayer w4: C1_PD19.2@7935,14800 7995,14740 8030,14740 8050,14720 v1(8050,14695)
  TopLayer w8: v1(8050,14695) 8052,14697 R3_PD19.2@8102.14,14697
  MidLayer1 w4: v1@6280,14750 6282.5,14747.5 6300,14730 6300,14630 6335,14595 6370,14595 6395,14570 6580,14570 6590,14580 6955,14580 6965,14590 7310,14590 7320,14600 7685,14600 7695,14610 8040,14610 8050,14620 v1(8050,14695)
  BottomLayer w4: v1@6280,14750 v1@6282.5,14752.5 ; v1(6285,14750) 6285,14765 6292.05,14772.05 JP2_BANK3.3@6333.98,14772.05
P3_BANK4: C1_PD27.2 JP2_BANK4.3 R3_PD27.2 | length 2295.4
  TopLayer w4: C1_PD27.2@7935,15460 7995,15400 8030,15400 8050,15380 v1(8050,15355)
  TopLayer w8: v1(8050,15355) 8052,15357 R3_PD27.2@8102.14,15357
  MidLayer1 w4: v1@6280,15410 6282.5,15407.5 6300,15390 6300,15290 6335,15255 6370,15255 6395,15230 6580,15230 6590,15240 6955,15240 6965,15250 7310,15250 7320,15260 7685,15260 7695,15270 8040,15270 8050,15280 v1(8050,15355)
  BottomLayer w4: v1@6280,15410 v1@6282.5,15412.5 ; v1(6285,15410) 6285,15425 6292.05,15432.05 JP2_BANK4.3@6333.98,15432.05
P4_BANK1: C1_PD4.2 JP2_BANK1.4 R3_PD4.2 | length 3112.1
  TopLayer w4: C1_PD4.2@8675,13480 8735,13420 8770,13420 8790,13400 v1(8790,13375)
  TopLayer w8: v1(8790,13375) 8792,13377 R3_PD4.2@8842.14,13377
  MidLayer1 w4: v2(6271.73,13471.73) 6255,13455 6255,13415 6280,13390 6280,13300 6325,13255 6360,13255 6375,13240 6965,13240 6975,13250 7320,13250 7330,13260 7695,13260 7705,13270 8050,13270 8060,13280 8425,13280 8435,13290 8780,13290 8790,13300 v1(8790,13375)
  BottomLayer w4: v2(6271.73,13471.73) JP2_BANK1.4@6333.98,13471.73
P4_BANK2: C1_PD12.2 JP2_BANK2.4 R3_PD12.2 | length 3120.4
  TopLayer w4: C1_PD12.2@8675,14140 8735,14080 8770,14080 8790,14060 v1(8790,14035)
  TopLayer w8: v1(8790,14035) 8792,14037 R3_PD12.2@8842.14,14037
  MidLayer1 w4: v2(6271.73,14131.73) 6255,14115 6255,14075 6280,14050 6280,13960 6325,13915 6360,13915 6385,13890 6590,13890 6600,13900 6965,13900 6975,13910 7320,13910 7330,13920 7695,13920 7705,13930 8050,13930 8060,13940 8425,13940 8435,13950 8780,13950 8790,13960 v1(8790,14035)
  BottomLayer w4: v2(6271.73,14131.73) JP2_BANK2.4@6333.98,14131.73
P4_BANK3: C1_PD20.2 JP2_BANK3.4 R3_PD20.2 | length 3120.4
  TopLayer w4: C1_PD20.2@8675,14800 8735,14740 8770,14740 8790,14720 v1(8790,14695)
  TopLayer w8: v1(8790,14695) 8792,14697 R3_PD20.2@8842.14,14697
  MidLayer1 w4: v2(6271.73,14791.73) 6255,14775 6255,14735 6280,14710 6280,14620 6325,14575 6360,14575 6385,14550 6590,14550 6600,14560 6965,14560 6975,14570 7320,14570 7330,14580 7695,14580 7705,14590 8050,14590 8060,14600 8425,14600 8435,14610 8780,14610 8790,14620 v1(8790,14695)
  BottomLayer w4: v2(6271.73,14791.73) JP2_BANK3.4@6333.98,14791.73
P4_BANK4: C1_PD28.2 JP2_BANK4.4 R3_PD28.2 | length 3120.4
  TopLayer w4: C1_PD28.2@8675,15460 8735,15400 8770,15400 8790,15380 v1(8790,15355)
  TopLayer w8: v1(8790,15355) 8792,15357 R3_PD28.2@8842.14,15357
  MidLayer1 w4: v2(6271.73,15451.73) 6255,15435 6255,15395 6280,15370 6280,15280 6325,15235 6360,15235 6385,15210 6590,15210 6600,15220 6965,15220 6975,15230 7320,15230 7330,15240 7695,15240 7705,15250 8050,15250 8060,15260 8425,15260 8435,15270 8780,15270 8790,15280 v1(8790,15355)
  BottomLayer w4: v2(6271.73,15451.73) JP2_BANK4.4@6333.98,15451.73
P5_BANK1: C1_PD5.2 JP2_BANK1.5 R3_PD5.2 | length 3610.3
  MidLayer1 w4: v2(6270,13530) 6245,13505 6245,13410 6270,13385 6270,13295 6320,13245 6355,13245 6370,13230 6970,13230 6980,13240 7325,13240 7335,13250 7700,13250 7710,13260 8055,13260 8065,13270 8430,13270 8440,13280 8785,13280 8795,13290 9160,13290 9170,13300 v1(9170,13375)
  BottomLayer w4: v2(6270,13530) 6270,13500 6278.58,13491.42 JP2_BANK1.5@6333.98,13491.42 ; v1(9170,13375) 9170,13400 9190,13420 9225,13420 C1_PD5.2@9285,13480
  BottomLayer w8: R3_PD5.2@9117.86,13377 9168,13377 v1(9170,13375)
P5_BANK2: C1_PD13.2 JP2_BANK2.5 R3_PD13.2 | length 3618.6
  MidLayer1 w4: v2(6270,14190) 6245,14165 6245,14070 6270,14045 6270,13955 6320,13905 6355,13905 6380,13880 6595,13880 6605,13890 6970,13890 6980,13900 7325,13900 7335,13910 7700,13910 7710,13920 8055,13920 8065,13930 8430,13930 8440,13940 8785,13940 8795,13950 9160,13950 9170,13960 v1(9170,14035)
  BottomLayer w4: v2(6270,14190) 6270,14160 6278.58,14151.42 JP2_BANK2.5@6333.98,14151.42 ; v1(9170,14035) 9170,14060 9190,14080 9225,14080 C1_PD13.2@9285,14140
  BottomLayer w8: R3_PD13.2@9117.86,14037 9168,14037 v1(9170,14035)
P5_BANK3: C1_PD21.2 JP2_BANK3.5 R3_PD21.2 | length 3618.6
  MidLayer1 w4: v2(6270,14850) 6245,14825 6245,14730 6270,14705 6270,14615 6320,14565 6355,14565 6380,14540 6595,14540 6605,14550 6970,14550 6980,14560 7325,14560 7335,14570 7700,14570 7710,14580 8055,14580 8065,14590 8430,14590 8440,14600 8785,14600 8795,14610 9160,14610 9170,14620 v1(9170,14695)
  BottomLayer w4: v2(6270,14850) 6270,14820 6278.58,14811.42 JP2_BANK3.5@6333.98,14811.42 ; v1(9170,14695) 9170,14720 9190,14740 9225,14740 C1_PD21.2@9285,14800
  BottomLayer w8: R3_PD21.2@9117.86,14697 9168,14697 v1(9170,14695)
P5_BANK4: C1_PD29.2 JP2_BANK4.5 R3_PD29.2 | length 3618.6
  MidLayer1 w4: v2(6270,15510) 6245,15485 6245,15390 6270,15365 6270,15275 6320,15225 6355,15225 6380,15200 6595,15200 6605,15210 6970,15210 6980,15220 7325,15220 7335,15230 7700,15230 7710,15240 8055,15240 8065,15250 8430,15250 8440,15260 8785,15260 8795,15270 9160,15270 9170,15280 v1(9170,15355)
  BottomLayer w4: v2(6270,15510) 6270,15480 6278.58,15471.42 JP2_BANK4.5@6333.98,15471.42 ; v1(9170,15355) 9170,15380 9190,15400 9225,15400 C1_PD29.2@9285,15460
  BottomLayer w8: R3_PD29.2@9117.86,15357 9168,15357 v1(9170,15355)
P6_BANK1: C1_PD6.2 JP2_BANK1.6 R3_PD6.2 | length 2753.2
  MidLayer1 w4: v1(6290,13510) 6290,13465 6265,13440 6265,13420 6290,13395 6290,13305 6330,13265 6365,13265 6380,13250 6960,13250 6970,13260 7315,13260 7325,13270 7690,13270 7700,13280 8045,13280 8055,13290 8420,13290 8430,13300 v1(8430,13375)
  BottomLayer w4: v1@6291.1,13511.1 JP2_BANK1.6@6333.98,13511.1 ; v1(8430,13375) 8430,13400 8450,13420 8485,13420 C1_PD6.2@8545,13480
  BottomLayer w8: R3_PD6.2@8377.86,13377 8428,13377 v1(8430,13375)
P6_BANK2: C1_PD14.2 JP2_BANK2.6 R3_PD14.2 | length 2761.5
  MidLayer1 w4: v1(6290,14170) 6290,14125 6265,14100 6265,14080 6290,14055 6290,13965 6330,13925 6365,13925 6390,13900 6585,13900 6595,13910 6960,13910 6970,13920 7315,13920 7325,13930 7690,13930 7700,13940 8045,13940 8055,13950 8420,13950 8430,13960 v1(8430,14035)
  BottomLayer w4: v1@6291.1,14171.1 JP2_BANK2.6@6333.98,14171.1 ; v1(8430,14035) 8430,14060 8450,14080 8485,14080 C1_PD14.2@8545,14140
  BottomLayer w8: R3_PD14.2@8377.86,14037 8428,14037 v1(8430,14035)
P6_BANK3: C1_PD22.2 JP2_BANK3.6 R3_PD22.2 | length 2761.5
  MidLayer1 w4: v1(6290,14830) 6290,14785 6265,14760 6265,14740 6290,14715 6290,14625 6330,14585 6365,14585 6390,14560 6585,14560 6595,14570 6960,14570 6970,14580 7315,14580 7325,14590 7690,14590 7700,14600 8045,14600 8055,14610 8420,14610 8430,14620 v1(8430,14695)
  BottomLayer w4: v1@6291.1,14831.1 JP2_BANK3.6@6333.98,14831.1 ; v1(8430,14695) 8430,14720 8450,14740 8485,14740 C1_PD22.2@8545,14800
  BottomLayer w8: R3_PD22.2@8377.86,14697 8428,14697 v1(8430,14695)
P6_BANK4: C1_PD30.2 JP2_BANK4.6 R3_PD30.2 | length 2761.5
  MidLayer1 w4: v1(6290,15490) 6290,15445 6265,15420 6265,15400 6290,15375 6290,15285 6330,15245 6365,15245 6390,15220 6585,15220 6595,15230 6960,15230 6970,15240 7315,15240 7325,15250 7690,15250 7700,15260 8045,15260 8055,15270 8420,15270 8430,15280 v1(8430,15355)
  BottomLayer w4: v1@6291.1,15491.1 JP2_BANK4.6@6333.98,15491.1 ; v1(8430,15355) 8430,15380 8450,15400 8485,15400 C1_PD30.2@8545,15460
  BottomLayer w8: R3_PD30.2@8377.86,15357 8428,15357 v1(8430,15355)
P7_BANK1: C1_PD7.2 JP2_BANK1.7 R3_PD7.2 | length 2052.5
  MidLayer1 w4: v2(6320,13315) 6350,13285 6380,13285 6395,13270 6950,13270 6960,13280 7305,13280 7315,13290 7680,13290 7690,13300 v1(7690,13375)
  BottomLayer w4: v2(6320,13315) 6380,13315 6395,13330 6395,13350 6385,13360 6380,13360 6365,13375 6365,13390 6385,13410 6385,13520 6374.21,13530.79 JP2_BANK1.7@6333.98,13530.79 ; v1(7690,13375) 7690,13400 7710,13420 7745,13420 C1_PD7.2@7805,13480
  BottomLayer w8: R3_PD7.2@7637.86,13377 7688,13377 v1(7690,13375)
P7_BANK2: C1_PD15.2 JP2_BANK2.7 R3_PD15.2 | length 2060.8
  MidLayer1 w4: v2(6320,13975) 6350,13945 6380,13945 6405,13920 6575,13920 6585,13930 6950,13930 6960,13940 7305,13940 7315,13950 7680,13950 7690,13960 v1(7690,14035)
  BottomLayer w4: v2(6320,13975) 6380,13975 6395,13990 6395,14010 6385,14020 6380,14020 6365,14035 6365,14050 6385,14070 6385,14180 6374.21,14190.79 JP2_BANK2.7@6333.98,14190.79 ; v1(7690,14035) 7690,14060 7710,14080 7745,14080 C1_PD15.2@7805,14140
  BottomLayer w8: R3_PD15.2@7637.86,14037 7688,14037 v1(7690,14035)
P7_BANK3: C1_PD23.2 JP2_BANK3.7 R3_PD23.2 | length 2060.8
  MidLayer1 w4: v2(6320,14635) 6350,14605 6380,14605 6405,14580 6575,14580 6585,14590 6950,14590 6960,14600 7305,14600 7315,14610 7680,14610 7690,14620 v1(7690,14695)
  BottomLayer w4: v2(6320,14635) 6380,14635 6395,14650 6395,14670 6385,14680 6380,14680 6365,14695 6365,14710 6385,14730 6385,14840 6374.21,14850.79 JP2_BANK3.7@6333.98,14850.79 ; v1(7690,14695) 7690,14720 7710,14740 7745,14740 C1_PD23.2@7805,14800
  BottomLayer w8: R3_PD23.2@7637.86,14697 7688,14697 v1(7690,14695)
P7_BANK4: C1_PD31.2 JP2_BANK4.7 R3_PD31.2 | length 2060.8
  MidLayer1 w4: v2(6320,15295) 6350,15265 6380,15265 6405,15240 6575,15240 6585,15250 6950,15250 6960,15260 7305,15260 7315,15270 7680,15270 7690,15280 v1(7690,15355)
  BottomLayer w4: v2(6320,15295) 6380,15295 6395,15310 6395,15330 6385,15340 6380,15340 6365,15355 6365,15370 6385,15390 6385,15500 6374.21,15510.79 JP2_BANK4.7@6333.98,15510.79 ; v1(7690,15355) 7690,15380 7710,15400 7745,15400 C1_PD31.2@7805,15460
  BottomLayer w8: R3_PD31.2@7637.86,15357 7688,15357 v1(7690,15355)
P8_BANK1: C1_PD8.2 JP2_BANK1.8 R3_PD8.2 | length 1212.9
  MidLayer1 w4: v1(6385,13380) 6350,13345 6350,13330 6370,13310 6385,13310 6405,13290 6940,13290 6950,13300 v1(6950,13375)
  BottomLayer w4: JP2_BANK1.8@6333.98,13550.47 6379.53,13550.47 6395,13535 6395,13390 v1(6385,13380) ; v1(6950,13375) 6950,13400 6970,13420 7005,13420 C1_PD8.2@7065,13480
  BottomLayer w8: R3_PD8.2@6897.86,13377 6948,13377 v1(6950,13375)
P8_BANK2: C1_PD16.2 JP2_BANK2.8 R3_PD16.2 | length 1221.2
  MidLayer1 w4: v1(6385,14040) 6350,14005 6350,13990 6370,13970 6385,13970 6415,13940 6565,13940 6575,13950 6940,13950 6950,13960 v1(6950,14035)
  BottomLayer w4: JP2_BANK2.8@6333.98,14210.47 6379.53,14210.47 6395,14195 6395,14050 v1(6385,14040) ; v1(6950,14035) 6950,14060 6970,14080 7005,14080 C1_PD16.2@7065,14140
  BottomLayer w8: R3_PD16.2@6897.86,14037 6948,14037 v1(6950,14035)
P8_BANK3: C1_PD24.2 JP2_BANK3.8 R3_PD24.2 | length 1221.2
  MidLayer1 w4: v1(6385,14700) 6350,14665 6350,14650 6370,14630 6385,14630 6415,14600 6565,14600 6575,14610 6940,14610 6950,14620 v1(6950,14695)
  BottomLayer w4: JP2_BANK3.8@6333.98,14870.47 6379.53,14870.47 6395,14855 6395,14710 v1(6385,14700) ; v1(6950,14695) 6950,14720 6970,14740 7005,14740 C1_PD24.2@7065,14800
  BottomLayer w8: R3_PD24.2@6897.86,14697 6948,14697 v1(6950,14695)
P8_BANK4: C1_PD32.2 JP2_BANK4.8 R3_PD32.2 | length 1221.2
  MidLayer1 w4: v1(6385,15360) 6350,15325 6350,15310 6370,15290 6385,15290 6415,15260 6565,15260 6575,15270 6940,15270 6950,15280 v1(6950,15355)
  BottomLayer w4: JP2_BANK4.8@6333.98,15530.47 6379.53,15530.47 6395,15515 6395,15370 v1(6385,15360) ; v1(6950,15355) 6950,15380 6970,15400 7005,15400 C1_PD32.2@7065,15460
  BottomLayer w8: R3_PD32.2@6897.86,15357 6948,15357 v1(6950,15355)
S_DIODE_PD1: C4_PD1.2 D1_PD1.1 D2_PD1.2 U1_PD1.7 | length 661.7
  TopLayer w4: D1_PD1.1@6815.01,13825 6862.35,13825 ; U1_PD1.7@6862.35,13750 6862.35,13825 ; C4_PD1.2@6969.99,13470 6969.99,13504.99 7009,13544 7009,13622 7020,13633 7020,13690 ; D2_PD1.2@7070,13690.01 7020.01,13690.01 ; 6862.35,13825 6885,13825 6890,13820 6950,13820 7020,13750 7020,13690.02
S_DIODE_PD2: C4_PD2.2 D1_PD2.1 D2_PD2.2 U1_PD2.7 | length 661.7
  TopLayer w4: D1_PD2.1@7555.01,13825 7602.35,13825 ; U1_PD2.7@7602.35,13750 7602.35,13825 ; C4_PD2.2@7709.99,13470 7709.99,13504.99 7749,13544 7749,13622 7760,13633 7760,13690 ; D2_PD2.2@7810,13690.01 7760.01,13690.01 ; 7602.35,13825 7625,13825 7630,13820 7690,13820 7760,13750 7760,13690.02